# EAGLE board 411_AutoFan (V1.3) (EAGLE 9.6.2)

Size 202.87 x 148.58 mm. Coordinates in mm from the lower left corner, seen from the top.
Outline: 0,0 201.6,0 202.87,148.58 1.27,148.58 0,0
Copper layers (1*16): Top 0.035mm / dielectric 1.5mm / Bottom 0.035mm
Design rules "default": minimum track width 6mil, minimum drill 0.35mm, track to track 6mil, track to pad 6mil, pad to pad 6mil, via to via 6mil, smd to smd 6mil, copper to edge 40mil, drill to drill 6mil, minimum pad ring 10mil, minimum via ring 8mil, stop-mask expansion 4mil, vias tented up to drill 0mil, thermal gap 10mil

## Footprints (pad centres in the part's own frame; a part is rotated, then mirrored left to right if it is on the bottom)
0805-NO = smd 1.24 x 1.5: 1 -0.95,0; 2 0.95,0
0603-NO = smd 1.075 x 1: 1 -0.85,0; 2 0.85,0
SOD-323 = smd 1.35 x 0.8: A 1.27,0; C -1.27,0
SOD-123 = smd 1.4 x 1.4: A 1.85,0; C -1.85,0
QFN24_4MM_SMSC = smd 0.8 x 0.28: 1 -2,1.25; 2 -2,0.75; 3 -2,0.25; 4 -2,-0.25; 5 -2,-0.75; 6 -2,-1.25; 13 2,-1.25; 14 2,-0.75; 15 2,-0.25; 16 2,0.25; 17 2,0.75; 18 2,1.25 | smd 0.28 x 0.8: 7 -1.25,-2; 8 -0.75,-2; 9 -0.25,-2; 10 0.25,-2; 11 0.75,-2; 12 1.25,-2; 19 1.25,2; 20 0.75,2; 21 0.25,2; 22 -0.25,2; 23 -0.75,2; 24 -1.25,2 | smd 2.5 x 2.5: THERM 0,0
BC9VPC = drill 2.032: V+ 53.086,21.336; V- 53.086,8.382 | hole 2.286: 27.178,3.81; 13.716,26.162; 40.64,26.162
TERMBLOCK_1X3_5.08MM = drill 1.3 pad 2.5 long: 1 5.08,0; 2 0.05,0 | drill 1.3 pad 2.54 long: 3 -5.08,0
1X01_ROUND = drill 1 pad 1.676: 1 0,0
LED5MM = drill 0.813 octagon: A -1.27,0; K 1.27,0
SOT23-3 = smd 0.8 x 0.9: 1 -0.95,-1; 2 0.95,-1; 3 0,1.1
SOT23-R = smd 0.635 x 1.016: 1 -0.95,-1; 2 0.95,-1; 3 0,1
0603-NO@2 = smd 1.1 x 1: 1 -0.85,0; 2 0.85,0
BVS = smd 2.7 x 6.2: 1 -4.14,0; 2 4.14,0
RESPACK_4X0603 = smd 0.45 x 0.9: 1 -1.3,-0.85; 2 -0.4,-0.85; 3 0.4,-0.85; 4 1.3,-0.85; 5 1.3,0.85; 6 0.4,0.85; 7 -0.4,0.85; 8 -1.3,0.85
TO-92 = drill 0.81 pad 1.51: 1 0,-1.8; 2 0,0; 3 0,1.8
SOT23-5 = smd 0.55 x 1.2: 1 -0.95,-1.3; 2 0,-1.3; 3 0.95,-1.3; 4 0.95,1.3; 5 -0.95,1.3
RELAY_G5LE-1 = drill 1.3 pad 2.54: 1 -8.35,0; 2 -6.35,-5.75; 3 5.85,-5.75; 4 5.85,6.25; 5 -6.35,6.25
DISPLAY-OLED-128X64-I2C = drill 1 square: 1 -3.81,12.7 | drill 1: 2 -1.27,12.7; 3 1.27,12.7; 4 3.81,12.7 | hole 2: -10.414,11.557; 10.414,11.557; 10.414,-11.557; -10.414,-11.557
JSTPH2 = smd 1 x 4.6: 1 -1,-3.7; 2 1,-3.7 | smd 1.6 x 3.4: NC1 -3.4,1.5; NC2 3.4,1.5
WROOM32_SKINNY = smd 1.2 x 0.9: 1 -8.5,5; 2 -8.5,3.73; 3 -8.5,2.46; 4 -8.5,1.19; 5 -8.5,-0.08; 6 -8.5,-1.35; 7 -8.5,-2.62; 8 -8.5,-3.89; 9 -8.5,-5.16; 10 -8.5,-6.43; 11 -8.5,-7.7; 12 -8.5,-8.97; 13 -8.5,-10.24; 14 -8.5,-11.51; 25 8.5,-11.51; 26 8.5,-10.24; 27 8.5,-8.97; 28 8.5,-7.7; 29 8.5,-6.43; 30 8.5,-5.16; 31 8.5,-3.89; 32 8.5,-2.62; 33 8.5,-1.35; 34 8.5,-0.08; 35 8.5,1.19; 36 8.5,2.46; 37 8.5,3.73; 38 8.5,5 | smd 0.9 x 1.2: 15 -5.7,-12.9; 16 -4.43,-12.9; 17 -3.16,-12.9; 18 -1.89,-12.9; 19 -0.62,-12.9; 20 0.65,-12.9; 21 1.92,-12.9; 22 3.19,-12.9; 23 4.46,-12.9; 24 5.73,-12.9 | smd 6 x 6: P$1 0.34,-2.7
4UCONN_20329_V2 = smd 1 x 2: BASE@1 -0.75,-2; BASE@2 0.75,-2 | smd 0.4 x 1.35: D+ 0,0.775; D- -0.65,0.775; GND 1.3,0.775; ID 0.65,0.775; VBUS -1.3,0.775 | drill 0.8 pad 1.143 offset: SPRT@1 -3.3,0.9; SPRT@2 3.3,0.9 | drill 0.9 pad 2.413 square: SPRT@3 -3.6,-1.9; SPRT@4 3.6,-1.9 | hole 0.7: -1.95,0; 1.95,0

## Placement (x,y rotation side)
C1  10uF  [0805-NO]  26.67,113.03 0 top
C2  10uF  [0805-NO]  20.32,113.03 0 top
C6  10µF  [0805-NO]  85.09,118.11 0 top
C7  1uF  [0603-NO]  58.42,118.11 0 top
C8  10µF  [0805-NO]  78.74,118.11 0 top
D3  1N4148  [SOD-323]  86.36,114.3 0 top
D4  MBR120  [SOD-123]  21.59,106.68 0 top
IC2  CP2104  [QFN24_4MM_SMSC]  48.26,97.79 0 top
J1  [BC9VPC]  33.02,36.83 0 top
JP1  [TERMBLOCK_1X3_5.08MM]  80.01,97.79 0 top
JP3  [1X01_ROUND]  82.55,113.03 0 top
LED1  [LED5MM]  36.83,97.79 0 top
LED2  [LED5MM]  24.13,97.79 0 top
LED3  [LED5MM]  80.01,107.95 0 top
Q1  mmbt2222  [SOT23-3]  71.12,113.03 0 top
Q2  mmbt2222  [SOT23-3]  67.31,113.03 0 top
Q3  DMG3415U  [SOT23-R]  59.69,113.03 0 top
Q5  MMBT2222  [SOT23-R]  52.07,113.03 0 top
R1  100K  [0603-NO@2]  73.66,118.11 0 top
R2  220  [BVS]  69.85,107.95 0 top
R3  100K  [0603-NO@2]  68.58,118.11 0 top
R4  220  [BVS]  58.42,107.95 0 top
R5  220  [BVS]  46.99,107.95 0 top
R7  100K  [0603-NO@2]  63.5,118.11 0 top
R10  1K  [0805-NO]  45.72,113.03 0 top
R11  10K  [0805-NO]  39.37,113.03 0 top
R12  100K  [0603-NO@2]  33.02,113.03 0 top
R13  10K  [RESPACK_4X0603]  26.67,106.68 0 top
RT2  TMP36GT9Z  [TO-92]  33.02,107.95 0 top
U2  AP2112-3.3  [SOT23-5]  74.93,114.3 0 top
U$5  RELAY_G5LE  [RELAY_G5LE-1]  57.15,74.93 0 top
U$6  DISPLAY-OLED-128X64-I2C  [DISPLAY-OLED-128X64-I2C]  74.93,17.78 0 top
U$7  RELAY_G5LE  [RELAY_G5LE-1]  34.29,74.93 0 top
X1  JSTPH  [JSTPH2]  67.31,100.33 0 top
X2  ESP32_WROOM32_SKINNY  [WROOM32_SKINNY]  78.74,81.28 0 top
X4  20329  [4UCONN_20329_V2]  57.15,101.6 0 top

## Library data of the parts
C1 C2 C6-C8 D3 D4 IC2 JP1 JP3 Q3 Q5 R1 R3 R7 R10-R13 U2 U$5 U$7 X1 X2 X4 = microbuilder
J1 = SparkFun-Connectors; PROD_ID: BATT-10855
LED1-LED3 = led
Q1 Q2 = SparkFun
R2 R4 R5 = resistor-shunt; OC_FARNELL: unknown; OC_NEWARK: unknown
RT2 = TMP36GT9Z; ARROW_PART_NUMBER: TMP36GT9Z; ARROW_PRICE-STOCK: https://www.arrow.com/en/products/tmp36gt9z/analog-devices; DESCRIPTION: TMP36GT9Z, Temperature Sensor +/-3C Serial-2 Wire 2.7 5.5 V 3-Pin TO-92; HEIGHT: mm; MANUFACTURER_NAME: Analog Devices; MANUFACTURER_PART_NUMBER: TMP36GT9Z; MOUSER_PART_NUMBER: 584-TMP36GT9Z; MOUSER_PRICE-STOCK: https://www.mouser.co.uk/ProductDetail/Analog-Devices/TMP36GT9Z?qs=WIvQP4zGanhT97N47MSoHw%3D%3D
U$6 = diy-modules

## Nets
3.3V: C1.1 C2.1 C7.1 C8.1 D3.C IC2.5 IC2.6 IC2.7 RT2.1 U2.5 U$5.2 U$6.2 X2.2
A0_DAC2: RT2.2 X2.11
A1_DAC1: X2.10
A2_I34: X2.6
A3_I39: X2.5
A4_IO36: X2.4
A5_IO4: X2.26
A13_I35: R1.1 R3.2 X2.7
DTR: IC2.23 Q2.2 R13.4
EN: R7.1 U2.3
GND: C1.2 C2.2 C6.2 C7.2 C8.2 IC2.2 IC2.THERM LED1.K LED2.K LED3.K Q5.2 R3.1 R11.1 R12.1 RT2.3 U2.2 U$6.1 X1.1 X2.1 X2.15 X2.38 X2.P$1 X4.BASE@1 X4.BASE@2 X4.GND X4.SPRT@1 X4.SPRT@2 X4.SPRT@3 X4.SPRT@4
GPIO0: Q2.3 X2.25
GPIO2: X2.24
IO12_A11: LED2.A R2.1 R4.2 X2.14
IO13_A12: R4.1 X2.16
IO14_A6: U$6.4 X2.13
IO15_A8: U$6.3 X2.23
IO16: X2.27
IO17: X2.28
IO27_A10: R5.1 X2.12
IO32_A7: X2.8
IO33_A9: X2.9
MISO: X2.31
MOSI: X2.30
N$2: LED1.A R2.2
N$3: LED3.A R5.2
N$5: JP1.1 U$7.4
N$6: J1.V-
N$7: C6.1 D4.C Q3.2 R7.2 U2.1
N$8: J1.V+ JP1.3 U$7.3
N$9: JP1.2 U$7.1
N$10: IC2.3 X4.D+
N$11: IC2.4 X4.D-
N$12: Q1.1 R13.5
N$13: Q2.1 R13.2
N$15: D3.A Q5.3 U$5.5
N$16: Q5.1 R10.2 R11.2
RELAYSIGNAL: JP3.1 R10.1 X2.33
RESET: Q1.3 X2.3
RTS: IC2.19 Q1.2 R13.7
RXD0: IC2.21 X2.34
SCK: X2.29
SCL: X2.36
SDA: X2.37
TXD0: IC2.20 X2.35
VBAT: Q3.3 R1.2 X1.2
VBUS: D4.A IC2.8 Q3.1 R12.2 X4.VBUS

## Tracks (layer width: path | path; a pad name or v marks a point on that pad's centre or on a via)
3.3V  (12 unrouted)
A0_DAC2  (1 unrouted)
A13_I35  (2 unrouted)
DTR  (2 unrouted)
EN  (1 unrouted)
GND  (28 unrouted)
GPIO0  (1 unrouted)
IO12_A11  (3 unrouted)
IO13_A12  (1 unrouted)
IO14_A6  (1 unrouted)
IO15_A8  (1 unrouted)
IO27_A10  (1 unrouted)
N$2  (1 unrouted)
N$3  (1 unrouted)
N$5  (1 unrouted)
N$7  (4 unrouted)
N$8  (2 unrouted)
N$9  (1 unrouted)
N$10  (1 unrouted)
N$11  (1 unrouted)
N$12  (1 unrouted)
N$13  (1 unrouted)
N$15  (2 unrouted)
N$16  (2 unrouted)
RELAYSIGNAL  (2 unrouted)
RESET  (1 unrouted)
RTS  (2 unrouted)
RXD0  (1 unrouted)
TXD0  (1 unrouted)
VBAT  (2 unrouted)
VBUS  (4 unrouted)